# Altium PCB R1250GS HandHeater and rear 5-12V.PcbDoc
Units mm, origin at the board's own origin, x right, y up, seen from the top; angles counter-clockwise.
Board outline 78.2 x 49.2 mm, 2 copper layers (Top Layer, Bottom Layer); 55 components, 24 nets, 99 pads, 4 vias.
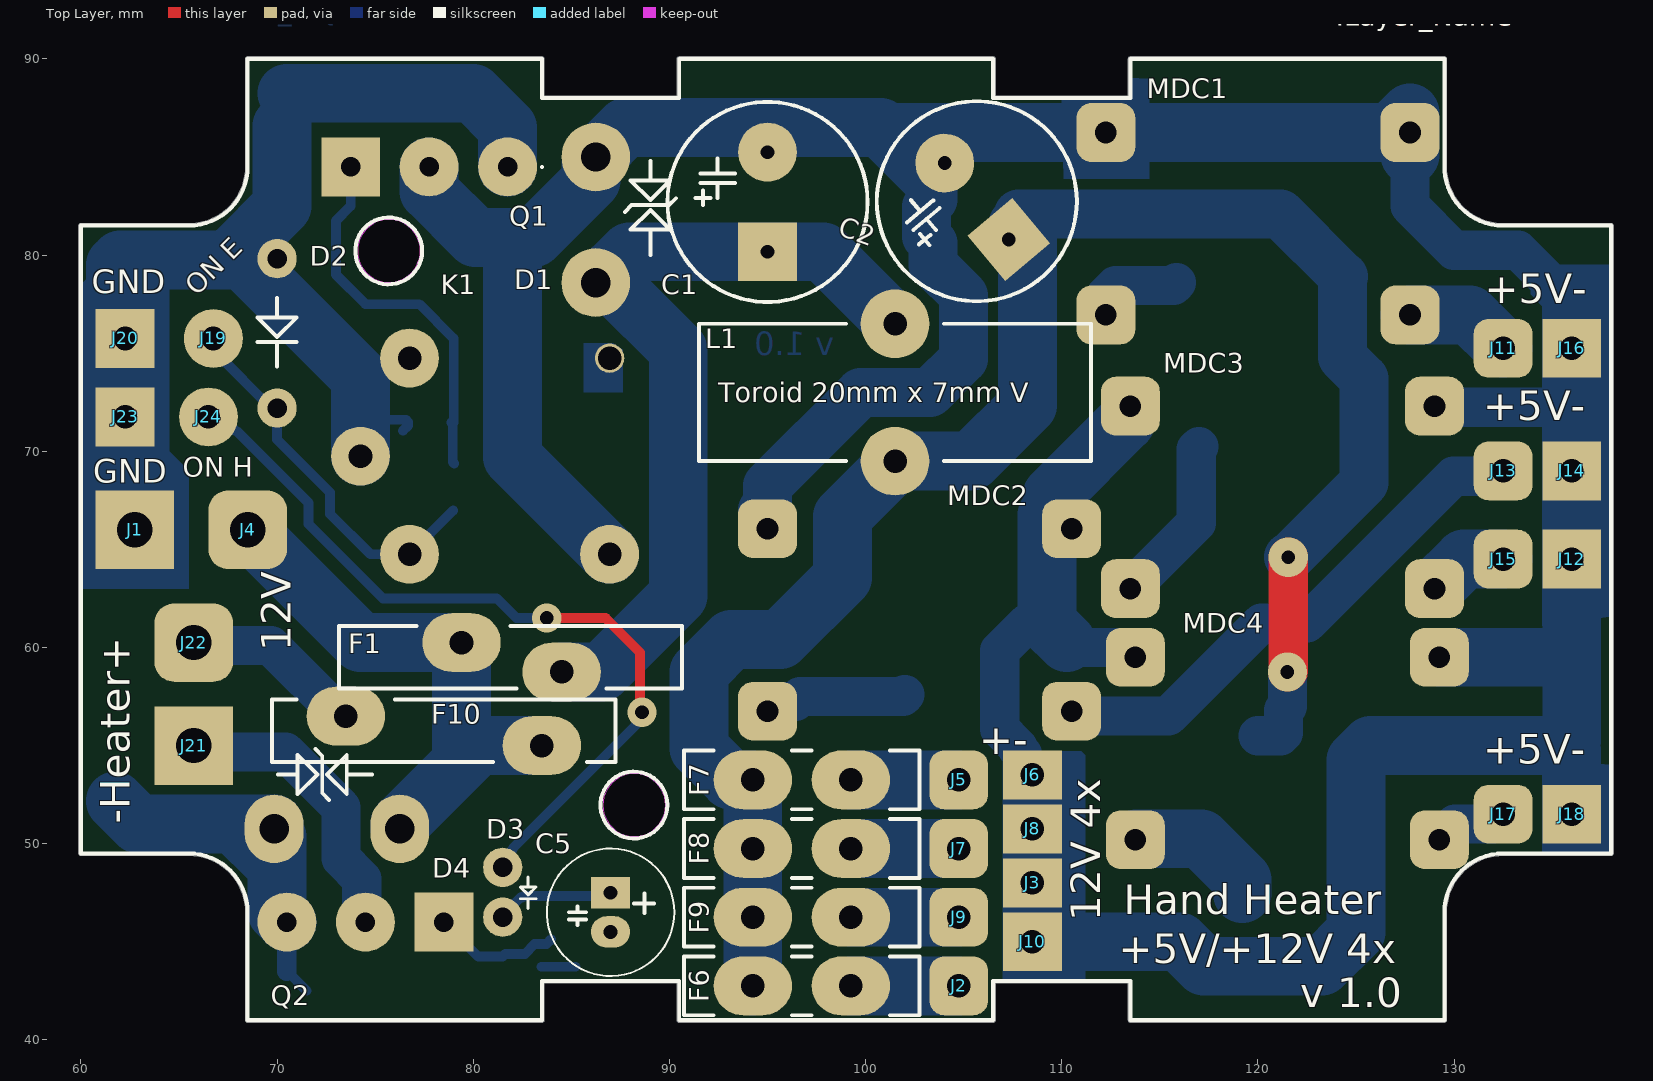
[diagram p0: Top Layer view]
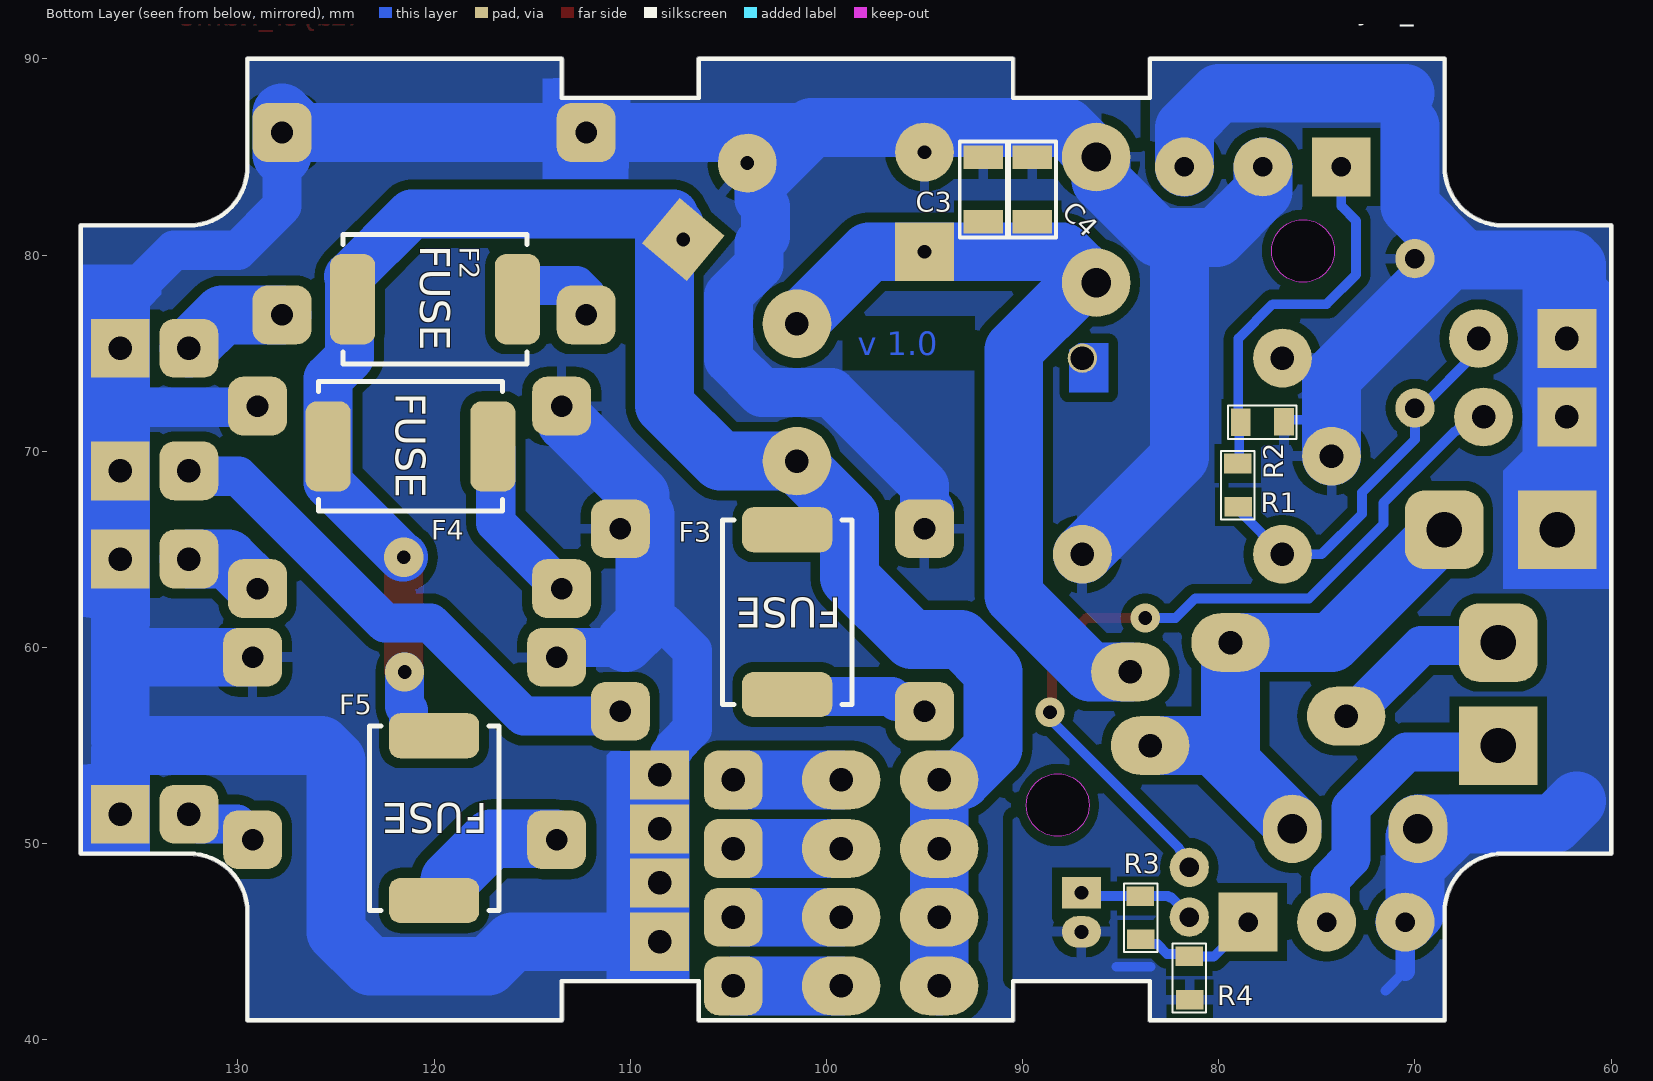
[diagram p1: Bottom Layer view, seen from below]

## Layer stack, top to bottom
Top Solder: solder mask 0.0102, Solder Resist, Dk 3.5
Top Layer: signal copper 0.0356
Dielectric 1: dielectric 0.32, FR-4, Dk 4.8
Bottom Layer: signal copper 0.0356
Bottom Solder: solder mask 0.0102, Solder Resist, Dk 3.5

## Board outline
68.4,41 68.4,46.5 cw(c68.5,46.5) 68.4,46.501 ccw(c65.5,46.5) 65.5,49.4 60,49.4 cw(c60,49.5) 59.9,49.5 59.9,81.5 cw(c60,81.5) 60,81.6 65.5,81.6 ccw(c65.5,84.5) 68.4,84.5 68.4,90 cw(c68.5,90) 68.5,90.1 83.5,90.1 cw(c83.5,90) 83.6,90 83.6,88.1 90.4,88.1 90.4,90 cw(c90.5,90) 90.5,90.1 106.5,90.1 cw(c106.5,90) 106.6,90 106.6,88.1 113.4,88.1 113.4,90 cw(c113.5,90) 113.5,90.1 129.5,90.1 cw(c129.5,90) 129.6,90 129.6,84.636 cw(c129.502,84.615) 129.603,84.615 cw(c129.502,84.615) 129.603,84.611 ccw(c132.5,84.5) 129.6,84.5 ccw(c132.5,84.5) 132.5,81.6 138,81.6 cw(c138,81.5) 138.1,81.5 138.1,49.501 138.1,49.5 cw(c138,49.5) 138,49.4 132.5,49.4 ccw(c132.5,49.5) 132.501,49.4 132.5,49.4 ccw(c132.5,46.5) 129.6,46.5 129.6,41 cw(c129.5,41) 129.5,40.9 113.5,40.9 cw(c113.5,41) 113.4,41 113.4,42.9 106.6,42.9 106.6,41 cw(c106.5,41) 106.5,40.9 90.5,40.9 cw(c90.5,41) 90.4,41 90.4,42.9 83.6,42.9 83.6,41 cw(c83.5,41) 83.5,40.9 68.5,40.9 cw(c68.5,41)
cut-out: 74.103,80.213 ccw(c75.703,80.213) 75.703,78.613 ccw(c75.703,80.213) 77.303,80.213 ccw(c75.703,80.213) 75.703,81.813 ccw(c75.703,80.213)
cut-out: 86.603,51.963 ccw(c88.203,51.963) 88.203,50.363 ccw(c88.203,51.963) 89.803,51.963 ccw(c88.203,51.963) 88.203,53.563 ccw(c88.203,51.963)

## Design rules (kind name [scope] priority, off if disabled: settings)
Clearance "Clearance_c5 pad" [InComponent('C5') vs InComponent('C5')] p1: gap=0.2 ignorepadtopadclearanceinfootprint=FALSE
Clearance [All] p2: gap=0.5 ignorepadtopadclearanceinfootprint=FALSE
ComponentClearance [All] p1: gap=0.01 collisioncheckmode=3 verticalgap=0.2 showdistances=FALSE
Height [All] p1: minheight=0 maxheight=30 prefheight=12.7
HoleSize [All] p1: absolutevalues=TRUE maxlimit=3.2 minlimit=0.4 maxpercent=80.000 minpercent=20.000
HoleToHoleClearance [All] p1: gap=0.2 allowstackedmicrovias=TRUE
PlaneClearance [All] p1: clearance=0.5
PlaneConnect [All] p1: planeconnectstyle=Relief reliefexpansion=0.508 reliefentries=4 reliefconductorwidth=0.5 reliefairgap=0.5
PolygonConnect [All] p1: connectstyle=Relief reliefconductorwidth=0.5 reliefentries=4 polygonreliefangle="90 Angle" airgapwidth=0.5
RoutingVias [All] p1: holewidth=0.7 width=1.5 viastyle="Through Hole" minholewidth=0.4 minwidth=0.4 maxholewidth=3.2 maxwidth=7
SilkToSilkClearance [All] p1: silktosilkclearance=0.05
SilkToSolderMaskClearance [IsPad] p1: minsilkscreentomaskgap=0.2 clearancetoexposedcopper=TRUE
SolderMaskExpansion [All] p1: expansion=0.1 istentingtop=FALSE
Width [All] p1: maxlimit=3 minlimit=0.2 preferedwidth=0.5
22 further rules are at their usual default settings.

## Components (designator, comment, footprint, x,y, rotation, side; value= is the part's Value field where it differs from the comment)
C1 "25V 1000uF" "Cap E p5.08mm D10.2mm (3p)" 95,80.17 r90 top
C2 "25V 1000uF" "Cap E p5.08mm D10.2mm (3p)" 107.3,80.8 r130 top
C3 "10nF" "SMD 1206 (3216)" 92,81.7 r90 bottom
C4 "100nF" "SMD 1206 (3216)" 89.5,81.7 r90 bottom
C5 "47uF 25V" "Cap E p2mm D6.5xH11" 87,47.5 r270 top
D1 "1.5KE20CA" "TVS diode DO-201 V"#1 86.25,85 r270 top
D2 "1N5819" "Diode DO-35" 70,79.82 r270 top value=1N5822
D3 "1N5822" "Diode DO-41 - Vertical" 81.5,48.79 r270 top
D4 "1.5KE20CA" "TVS diode DO-201 V"#2 69.85,50.75 r0 top
F1 "11A" "Fuse RGE1100" 79.4,59.5 r90 top
F2 "3A" "Fuse SM250" 115.75,77.75 r0 bottom
F3 "3A" "Fuse SM250" 102,57.6 r90 bottom
F4 "3A" "Fuse SM250" 117,70.25 r0 bottom
F5 "3A" "Fuse SM250" 120,47.1 r90 bottom
F6 "3A" "Fuse MF-R300 (3A)" 99.25,42.75 r270 top
F7 "3 A" "Fuse MF-R300 (3A)" 99.25,53.25 r270 top
F8 "3 A" "Fuse MF-R300 (3A)" 99.25,49.75 r270 top
F9 "3 A" "Fuse MF-R300 (3A)" 99.25,46.25 r270 top
F10 "5A" "Fuse MF-R500 (5A)" 83.5,55 r270 top
J1 "OnePinC" "OnePin 1.8x4 - Square" 62.75,66 r90 top
J2 "OnePinC" "OnePin 1.2x3 - Rounded" 104.75,42.75 r90 top
J3 "OnePinC" "OnePin 1.2x3 - Square"#1 108.5,48 r180 top
J4 "OnePinC" "OnePin 1.8x4 - Rounded" 68.5,66 r90 top
J5 "OnePinC" "OnePin 1.2x3 - Rounded" 104.75,53.25 r180 top
J6 "OnePinC" "OnePin 1.2x3 - Square"#1 108.5,53.5 r0 top
J7 "OnePinC" "OnePin 1.2x3 - Rounded" 104.75,49.75 r0 top
J8 "OnePinC" "OnePin 1.2x3 - Square"#1 108.5,50.75 r0 top
J9 "OnePinC" "OnePin 1.2x3 - Rounded" 104.75,46.25 r0 top
J10 "OnePinC" "OnePin 1.2x3 - Square"#2 108.5,45 r0 top
J11 "OnePinC" "OnePin 1.2x3 - Rounded" 132.5,75.25 r0 top
J12 "OnePinC" "OnePin 1.2x3 - Square"#2 136,64.5 r0 top
J13 "OnePinC" "OnePin 1.2x3 - Rounded" 132.5,69 r0 top
J14 "OnePinC" "OnePin 1.2x3 - Square"#2 136,69 r0 top
J15 "OnePinC" "OnePin 1.2x3 - Rounded" 132.5,64.5 r0 top
J16 "OnePinC" "OnePin 1.2x3 - Square"#2 136,75.25 r0 top
J17 "OnePinC" "OnePin 1.2x3 - Rounded" 132.5,51.5 r0 top
J18 "OnePinC" "OnePin 1.2x3 - Square"#2 136,51.5 r0 top
J19 "OnePinC" "OnePin 1.2x3" 66.75,75.75 r0 top
J20 "OnePinC" "OnePin 1.2x3 - Square"#2 62.25,75.75 r0 top
J21 "OnePinC" "OnePin 1.8x4 - Square" 65.75,55 r0 top
J22 "OnePinC" "OnePin 1.8x4 - Rounded" 65.75,60.25 r0 top
J23 "OnePinC" "OnePin 1.2x3 - Square"#2 62.25,71.75 r0 top
J24 "OnePinC" "OnePin 1.2x3" 66.5,71.75 r0 top
K1 "SRA-12VDC-CL" SRA-12VDC-CL 74.25,69.75 r0 top
L1 "Inductor V" "Toroid V D20 W7" 101.5,76.5 r270 top value=700nH
MDC1 "DC-DC" "DC-DC_MP1584N (SMALL)" 112.25,76.95 r0 top
MDC2 "DC-DC" "DC-DC_MP1584N (SMALL)" 95,56.75 r0 top
MDC3 "DC-DC" "DC-DC_MP1584N (SMALL)" 113.5,63 r0 top
MDC4 "DC-DC" "DC-DC_MP1584N (SMALL)" 113.75,50.2 r0 top
Q1 "IRF3205 PBf" "TO220-2 HighPower" 73.75,84.5 r270 top
Q2 "IRF3205 PBf" "TO220-2 HighPower" 78.5,46 r90 top
R1 "1k Om" "SMD 0805 (2012)" 79,67.25 r90 bottom
R2 "10k Om" "SMD 0805 (2012)" 76.75,71.5 r0 bottom
R3 "1 kOm" "SMD 0805 (2012)" 84,47.25 r270 bottom
R4 "20k Om" "SMD 0805 (2012)" 81.475,42.125 r90 bottom

## Footprints (in the part's own frame and the unit in brackets; to place one, negate y for a bottom-side part, rotate by r counter-clockwise, add the part's x,y. Pads: shape width x height; smd on the part's side, far side on the other; paste and mask are expansions set on the pad)
"Cap E p2mm D6.5xH11" [mm] "D 6.5mm; H 11mm"
  rect 1.6x2 hole 0.7: 1(0,0)
  oval 1.6x2 hole 0.7: 2(2,0)
  silkscreen extent -2.25,-3.25 4.25,3.25, body extent -2.22,-3.22 4.27,3.28, height 11.49
"Cap E p5.08mm D10.2mm (3p)" [mm] "D 10.2mm; H 17.5mm, Hole: 0.7mm"
  rect 3x3 hole 0.7: 1(0,0)
  round 3 hole 0.7: 2(5.08,0)
  silkscreen extent -2.56,-5.1 7.64,5.1, body extent -2.49,-4.97 7.57,5.08, height 16.53
"DC-DC_MP1584N (SMALL)" [mm]
  rrect50% 3x3 hole 1.1: GND(0,9.3) GND(15.5,9.3) IN(0,0) Out(15.5,0)
  body extent -1.27,-1.27 16.8,10.6, height 6.7
"Diode DO-35" [mm] "p7.62mm"
  round 2 hole 1: A(0,0) K(7.62,0)
  silkscreen extent 2,-1 5.5,1, body extent -0.32,-1 7.82,1.02, height 2.21
"Diode DO-41 - Vertical" [mm] "p10.16mm"
  round 2 hole 1: A(0,0) K(2.54,0)
  silkscreen extent 0.5,0.9 2.1,1.7, body extent -0.43,-1.37 3.9,1.37, height 9.64
"Fuse MF-R300 (3A)" [mm] "Resettable 11A"
  oval 3x4 hole 1.2: 1(0,0) 2(0,-5)
  silkscreen extent -1.5,-8.5 1.5,3.5, body extent -1.53,-6.19 1.43,1.39, height 15
"Fuse MF-R500 (5A)" [mm] "Resettable 11A"
  oval 3x4 hole 1.2: 1(0,0) 2(-1.5,-10)
  silkscreen extent -2.35,-13.75 0.85,3.75, body extent -2.21,-13.75 0.71,3.75, height 26.01
"Fuse RGE1100" [mm] "Resettable 11A"
  oval 3x4 hole 1.2: 1(0.75,0) 2(-0.75,-5.1)
  silkscreen extent -1.6,-11.25 1.6,6.25, body extent -1.46,-11.3 1.46,6.2, height 26.01
"Fuse SM250" [mm] "Resettable 11A"
  rrect50% 2.3x4.6 smd: 1(0,0) 2(8.4,0)
  silkscreen extent -0.5,-3.3 8.9,3.3, body extent -0.5,-3.35 8.9,3.36, height 3
"OnePin 1.2x3" [mm]
  round 3 hole 1.2: 1(0,0)
"OnePin 1.2x3 - Rounded" [mm]
  rrect50% 3x3 hole 1.2: 1(0,0)
"OnePin 1.2x3 - Square"#1 [mm]
  rect 3x2.5 hole 1.2: 1(0,0)
"OnePin 1.2x3 - Square"#2 [mm]
  rect 3x3 hole 1.2: 1(0,0)
"OnePin 1.8x4 - Rounded" [mm]
  rrect50% 4x4 hole 1.8: 1(0,0)
"OnePin 1.8x4 - Square" [mm]
  rect 4x4 hole 1.8: 1(0,0)
"SMD 0805 (2012)" [mm]
  rect 1x1.4 smd: 1(-0.075,0) 2(2.125,0.025)
  silkscreen extent -0.72,-0.82 2.78,0.87, body extent 0.03,-0.6 2.03,0.65, height 0.45
"SMD 1206 (3216)" [mm]
  rect 1.2x2 smd: 1(0,0) 2(3.3,0)
  silkscreen extent -0.8,-1.2 4.1,1.2, body extent 0.05,-0.75 3.25,0.85, height 1
SRA-12VDC-CL [mm]
  round 1.5 hole 1.2: 1(12.7,5)
  round 3 hole 1.2: 2(0,0) 3(12.7,-5) 4(2.5,-5) 5(2.5,5)
  body extent -3,-8 17,8, height 15
"TO220-2 HighPower" [mm]
  rect 3x3 hole 1: 1(0,0)
  round 3 hole 1: 2(0,4) 3(0,8)
  body extent -2.7,-1.2 1.8,9.2, height 19
"Toroid V D20 W7" [mm] "10mm Black ring TEC.ORG"
  round 3.5 hole 1.2: 1(0,0) 2(7,0)
  silkscreen extent 0,-10 7,10, body extent -0.77,-8.69 7.77,8.69, height 20.82
"TVS diode DO-201 V"#1 [mm] "6p, p15.24mm"
  round 3.5 hole 1.5: 1(0,0) 2(6.4,0)
  silkscreen extent 0.2,1.47 5,4.07, body extent -2.8,-2.8 7.09,2.8, height 15.69
"TVS diode DO-201 V"#2 [mm] "6p, p15.24mm"
  oval 3x3.5 hole 1.5: 1(0,0) 2(6.4,0)
  silkscreen extent 0.2,1.47 5,4.07, body extent -2.8,-2.8 7.09,2.8, height 15.69

## Part data
C1 C2: library part "Cap E 1000mF x 25V", "Capacitor"
C3 C4: library part "Cap Ceramic SMD (All)", "Capacitor"
C5: library part "Cap Elecrolitic", "Capacitor"
D1 D4: library part "TVS 1.5KE20CA", "1500W Transil (TVS Diode)", Pulse Power=1500W, Breakdown V="min 19 max 21", Load A=5, PackageReference=DO-201, Stand-Off V=17.1
D2 D3: library part "D Shotki All", "Shotki  Diode", PackageReference=DO-201
F1 F2 F3 F4 F5 F6 F7 F8 F9 F10: library part Fuse, "Round fuse"
J1 J2 J3 J4 J5 J6 J7 J8 J9 J10 J11 J12 J13 J14 J15 J16 J17 J18 J19 J20 J21 J22 J23 J24: library part "OnePin Connector", "Only pad"
K1: "Single-Pole Dual-Throw Relay", DataSheet=http://tec.org.ru/_bd/12/1208_SRA.pdf, I (AC = 240 V)=15-20A, I (DC = 30 V)=10A, Name=SRA-12VDC-CL, R обм="240 Om", U="12 V"
L1: "Inductor Vertical", Code_IEC=1005, Code_JEITA=0402, LatestRevisionDate=29-May-2009, LatestRevisionNote="IPC-7351 Footprint Added.", PackageDescription="Chip Inductor", PackageReference=0402-A, Published=8-Jun-2000, Publisher="Altium Limited"
MDC1 MDC2 MDC3 MDC4: library part "DC-DC MP1584N", "DC-DC StepDown"
Q1 Q2: library part IRF3205, "N-Channel 55V - 0.008Ω - 110A", I d - Drain current (continuous) at TC = 25°C="110 A", I d - Drain current (continuous) at TC = 100°C="80 A", C ISS Входная емкость="3247 pF", C OSS Выходная емкость="781 pF", DataSheet=http://tec.org.ru/_bd/2/223_IRF3205.pdf, Monufacturer=IOR, Name="IRF3205 PBf", RDS Сопротивление Сток-Исток="0.008 Om", URL=http://tec.org.ru/board/49-1-0-223, V DSS (v)=55V, VGS Макс напр на гейте="+-20 V", VGS Порог Открытия="+2....+4 V"
R1 R2 R3 R4: library part "Res All Types"

## Via types
v1: diameter 1.5, hole 0.7, Top Layer to Bottom Layer, 2 vias
v2: diameter 2, hole 0.7, Top Layer to Bottom Layer, 2 vias

## Nets (pads, with @x,y where several pads share a name; then routed paths per layer and width w, separated by ;. In a path a pad name is that pad's centre, name@x,y a point inside that pad or via, vN(x,y) a via of type N, cw(c..) or ccw(c..) an arc to the next point about the centre after c; other vN are vias at no path point)
"+5V #1": J11.1 MDC1.Out | length 5.5
  Bottom Layer w3: MDC1.Out 130.8,76.95 J11.1
"+5V #2": J13.1 MDC2.Out | length 27.3
  Bottom Layer w2: MDC2.Out 110.75,56.5 115.432,56.5 120.182,61.25 122.5,61.25 129.973,68.723 132.223,68.723 J13.1
"+5V #3": J15.1 MDC3.Out | length 4.1
  Bottom Layer w3: MDC3.Out 130.5,64.5 J15.1
"+5V #4": J17.1 MDC4.Out | length 3.8
  Bottom Layer w2: MDC4.Out 130.05,51 132,51 J17.1
"+12 V RAW": C1.1 C3.1 C4.1 D1.2 F1.2 L1.1 | length 43.1
  Bottom Layer w3: F1.2 86.55,58.75 90.45,62.65 90.45,75.17 87.116,78.504 86.346,78.504 D1.2 86.385,78.6 87.955,80.17 C1.1 97.83,80.17 L1.1
+12V: D4.2 F1.1 F10.1 J4.1 | length 28.5
  Bottom Layer w3: J4.1 69,65.5 74.25,60.25 78.9,60.25 F1.1 79.4,54.15 ; D4.2 76.25,51 79.4,54.15 ; F10.1 80.25,55 79.4,54.15
"+12V Heater": F10.2 J22.1 | length 9.3
  Bottom Layer w2: J22.1 65.9,60.1 69.671,60.1 73.271,56.5 F10.2
"+12V No Noise": C2.1 F2.2 F3.2 F4.2 F5.2 F6.2 F7.2 F8.2 F9.2 L1.2 | length 96.9
  Top Layer w2: v2(121.5,58.75) 121.55,58.8 v2(121.55,64.6)
  Bottom Layer w2: F5.2 121.15,55.5 121.3,55.65 121.3,56.8 121.5,57 v2(121.5,58.75)
  Bottom Layer w2.5: C2.1@107.75,81.5 C2.1@108.518,81.5 ; C2.1@107.8,82.1 121.15,82.1 F2.2@124.35,78.9 ; v2(121.55,64.6) 121.6,64.6 125.4,68.4 F4.2 125.4,73.7 124.3,74.8 F2.2@124.3,78.9
  Bottom Layer w3: F6.2 F9.2 F8.2 F7.2 93.111,53.25 91.5,54.861 91.5,58.75 93.15,60.4 95.65,60.4 98.818,63.568 98.818,66.682 101.5,69.365 L1.2 105.4,69.5 108.25,72.35 108.25,81 C2.1@107.75,81.5
GND: C1.2 C2.2 C3.2 C4.2 D1.1 J3.1 J6.1 J8.1 J10.1 J12.1 J14.1 J16.1 J18.1 K1.3 MDC1.GND MDC2.GND MDC3.GND MDC4.GND Q1.2 | length 225.5
  Bottom Layer w2: J6.1 108.25,53.5 108,53.75 108,54.568 107.75,54.818 107.75,54.932 106.841,55.841 106.841,59.841 108.25,61.25 109.25,61.25 ; 110.25,60.25 110.5,60 113.25,60 MDC4.GND@113.75,59.5 ; MDC1.GND@127.75,85.106 127.75,82.5 130,80.25 133.25,80.25 135.8,77.7 J16.1@135.8,76.329 ; MDC3.GND@129,72.25 136.254,72.25
  Bottom Layer w2.5: MDC2.GND@94.75,67 95,67.25 95,68.25 99.75,73 103.286,73 105,74.714 105,77.95 103.446,79.503 103.446,80.614 103.1,80.96 103.1,82.488 103.446,82.834 103.446,83.944 C2.2@103.351,84.04
  Bottom Layer w3: Q1.2 77.75,83.257 80.113,80.894 83.094,80.894 86,83.8 86,84.615 86.154,84.769 86.154,84.904 D1.1 87.75,86.5 92.5,86.5 95,86.5 100.75,86.5 101,86.25 ; 82,80.75 82,69.7 K1.3 ; C2.2@103.351,84.04 103.21,84.04 101,86.25 ; J6.1@108.5,53 J8.1 J3.1 J10.1 116,45 117.25,43.75 123.25,43.75 125,45.5 125,54.25 125.75,55 135.75,55 ; 110.25,60.25 109.25,61.25 109.25,66.75 109.5,67 109.5,67.75 MDC3.GND@113.25,71.5 ; MDC1.GND@127.75,85.106 127.75,87.25 126.75,86.25 112.25,86.25 101,86.25 ; MDC4.GND@129.25,59.5 134.353,59.5 ; J18.1 136,54.75 135.75,55 ; J12.1@136,65.25 J12.1 136,55.25 135.75,55 ; J16.1 136.254,74.996 136.254,72.25 136.254,66.417
"GND Heater": J21.1 Q2.2 | length 15.5
  Bottom Layer w2: J21.1@65.75,55.75 65.75,55.672 66.75,54.672 70.421,54.672 73.25,51.843 73.25,49.257 74.309,48.199 74.309,46.191 Q2.2
"GND In": C5.2 D2.A D4.1 J1.1 J20.1 J23.1 K1.2 K1.5 Q1.3 Q2.3 R2.1 R4.1 | length 82.2
  Bottom Layer w0.5: 70.5,43.5 71.5,42.5 ; K1.2 K1.2@74.925,69.75 ; 74.25,71.607 76.568,71.607 R2.1 76.675,71.3 R2.1@76.425,71.05 ; 74.25,73.75 74.772,74.272 76.272,74.272 K1.5 ; 83.472,43.722 85.222,43.722
  Bottom Layer w1: 70.5,43.5 Q2.3
  Bottom Layer w3: 61.75,52.172 62.922,51 D4.1@69.85,51 ; 61.75,79.5 61.75,65 J1.1 ; 62,79.75 67.5,79.75 67.875,80.125 ; D4.1 69.85,50.5 70,50.35 70,46.5 Q2.3 ; 70.25,86.578 70.25,82.5 67.875,80.125 ; 70.5,88.25 79.993,88.25 81.75,86.493 Q1.3 ; K1.2 74.25,71.607 74.25,73.75 68.44,79.56 67.875,80.125
"Heater IN": D3.A J24.1 | length 41.5
  Top Layer w0.5: v1(83.75,61.5) 86.75,61.5 88.5,59.75 88.5,56.8 v1(88.6,56.7)
  Bottom Layer w0.5: J24.1 67.176,71.75 67.905,71.021 67.953,71.021 71.6,67.375 71.6,66.3 75.4,62.5 81.2,62.5 82.2,61.5 v1(83.75,61.5) ; D3.A 81.5,49.196 82.007,49.703 82.007,49.757 88.6,56.35 v1(88.6,56.7)
NetC5_1: C5.1 D3.K R3.1 | length 5.8
  Bottom Layer w0.5: D3.K@81.5,46.75 81.906,46.75 82.406,47.25 82.5,47.25 82.575,47.325 R3.1 86.825,47.325 C5.1
NetF2_1: F2.1 MDC1.IN | length 3.9
  Bottom Layer w2: MDC1.IN@112.25,77.95 112.75,78.45 115.7,78.45 F2.1@115.85,78.6
NetF3_1: F3.1 MDC2.IN | length 7.4
  Bottom Layer w2: MDC2.IN 95.5,57.25 96.422,57.25 96.672,57.5 101.9,57.5 F3.1
NetF4_1: F4.1 MDC3.IN | length 8.7
  Bottom Layer w2: MDC3.IN 116.85,66.35 116.85,70.1 F4.1
NetF5_1: F5.1 MDC4.IN | length 7
  Bottom Layer w3: MDC4.IN 113.8,50.25 117.093,50.25 119.2,48.143 F5.1@119.2,47.45
NetF6_1: F6.1 J2.1 | length 5.5
  Bottom Layer w3: F6.1 J2.1
NetF7_1: F7.1 J5.1 | length 5.5
  Bottom Layer w3: F7.1 J5.1
NetF8_1: F8.1 J7.1 | length 5.5
  Bottom Layer w3: F8.1 J7.1
NetF9_1: F9.1 J9.1 | length 5.5
  Bottom Layer w3: F9.1 J9.1
NetQ1_1: Q1.1 R1.2 R2.2 | length 19.6
  Bottom Layer w0.5: Q1.1 73.75,82.5 73,81.75 73,79 74.5,77.5 77.25,77.5 79,75.75 R2.2@79,71.475 ; R2.2 78.95,71.4 78.95,71 78.95,69.45 R1.2
NetQ2_1: Q2.1 R3.2 R4.2 | length 6.6
  Bottom Layer w0.5: Q2.1 80.25,44.25 R4.2 81.63,44.38 82.63,44.38 83.125,44.875 83.725,44.875 R3.2
"ON Ingition": D2.K J19.1 K1.4 R1.1 | length 19.5
  Bottom Layer w0.5: J19.1 66.75,75.15 D2.K@69.85,72.05 ; D2.K 70,70.6 72.7,67.9 72.7,66.8 74.75,64.75 K1.4 R1.1@78.975,66.975
pads on no net: K1.1

## Polygon pours and split planes (outlines as drawn)
GND on Bottom Layer "GND_L02_P001" (solid, pour order 1): 89,43.5 75.2,60.3 75.2,90 83.5,90.1 cw(c83.5,90) 83.6,90 83.6,88.1 90.4,88.1 90.4,90 cw(c90.5,90) 90.5,90.1 106.5,90.1 cw(c106.5,90) 106.6,90 106.6,88.1 113.4,88.1 113.4,90 cw(c113.5,90) 113.5,90.1 129.5,90.1 cw(c129.5,90) 129.6,90 129.6,84.636 cw(c129.519,84.617) 129.603,84.615 ccw(c132.585,84.5) 129.6,84.5 ccw(c132.5,84.5) 132.5,81.6 138,81.6 cw(c138,81.5) 138.1,81.5 138.1,49.501 cw(c138,49.5) 138,49.4 132.5,49.4 ccw(c132.5,46.5) 129.6,46.5 129.6,41 cw(c129.5,41) 129.5,40.9 113.5,40.9 cw(c113.5,41) 113.4,41 113.4,42.9 106.6,42.9 106.6,41 cw(c106.5,41) 106.5,40.9 90.5,40.9 cw(c90.5,41) 90.4,41 90.4,42.9
"GND In" on Bottom Layer "GND_IN_L02_P000" (solid, pour order 0): 68.5,41 68.5,46.5 ccw(c65.5,46.5) 65.5,49.5 60,49.5 60,81.5 65.5,81.5 ccw(c65.5,84.5) 68.5,84.5 68.5,90 83.5,90 83.5,84.5 75.5,84.5 75.5,79.5 79.5,75.5 79.5,67 77,64.5 78.9,62.5 82.75,62.5 90.5,55.5 90.5,43 83.5,43 83.5,41

## Other copper
Top Layer:
  text ".Layer_Name" at 123.975,91.7 h1
Bottom Layer:
  region net GND: 107,42.9 111.2,42.9 111.2,54.5 111,54.7 107,54.7
  region net GND: 138.1,54 138.071,53.971 138.071,49.429 134.529,49.429 134.5,49.4 134.5,54.4
  region net GND: 138.1,61.6 138.1,79.6 138,79.5 133.9,79.5 133.9,78 134.5,77.4 134.5,61.1
  region net GND: 114.45,89 114.45,83.9 110.1,83.9 110,88.1 113.4,88.1 113.4,89.05
  region net "GND In": 66.9,49.8 68.6,48.1 70.5,48.1 70.5,51.4 70.6,51.5 70.5,51.6 66.6,51.6
  region net "GND In": 65.5,63 65.5,69 64.5,70 64.5,79 60.5,79 60,78.5 60,63
  region: 85.625,75.5 87.125,75.5 87.625,75.167 87.625,73 85.625,73
  text ".Layer_Name" at 75,92 h1
  text "v 1.0" at 98.4,74.9 h1.2

## Silkscreen, mask and mechanical layers (free items; w line width, h text height)
Top Overlay:
  circle w0.2: c75.69,80.216 r1.706
  circle w0.2: c88.19,51.966 r1.706
  lines w0.2: 129.5,84.5 129.5,90 113.5,90 113.5,88 106.5,88 106.5,90 90.5,90 90.5,88 83.5,88 83.5,90 68.5,90 68.5,84.5 cw(c65.5,84.5) 65.5,81.5 60,81.5 60,49.5 65.5,49.5 cw(c65.5,46.5) 68.5,46.5 68.5,41 83.5,41 83.5,43 90.5,43 90.5,41 106.5,41 106.5,43 113.5,43 113.5,41 129.5,41 129.5,46.5 cw(c132.5,46.5) 132.5,49.5 138,49.5 138,81.5 132.5,81.5 cw(c132.5,84.5) 129.502,84.615 ; 83.5,84.5 83.5,84.5
  text ".Layer_Name" at 123.975,91.7 h1
  text "GND" at 60.55,78.05 h1.2
  text "ON E" at 65.9,77.883 h1 r45
  text "+5V-" at 131.55,77.55 h1.5
  text "+5V-" at 131.496,71.581 h1.5
  text "ON H" at 65.2,68.7 h1
  text "GND" at 60.625,68.389 h1.2
  text "12V" at 70.7,59.8 h1.5 r90
  text "+-" at 105.8,54.55 h1.5
  text "+5V-" at 131.496,54.081 h1.5
  text "-Heater+" at 62.5,51 h1.5 r90
  text "Hand Heater" at 113.15,46.4 h1.5
  text "12V 4x" at 111.95,46.05 h1.5 r90
  text "+5V/+12V 4x" at 112.9,43.9 h1.5
  text "v 1.0" at 122.15,41.65 h1.5
Bottom Overlay:
  lines w0.2: 129.5,84.5 129.5,90 113.5,90 113.5,88 106.5,88 106.5,90 90.5,90 90.5,88 83.5,88 83.5,90 68.5,90 68.5,84.5 cw(c65.5,84.5) 65.5,81.5 60,81.5 60,49.5 65.5,49.5 cw(c65.5,46.5) 68.5,46.5 68.5,41 83.5,41 83.5,43 90.5,43 90.5,41 106.5,41 106.5,43 113.5,43 113.5,41 129.5,41 129.5,46.5 cw(c132.5,46.5) 132.5,49.5 138,49.5 138,81.5 132.5,81.5 cw(c132.5,84.5) 129.502,84.615
  text ".Layer_Name" at 75,92 h1
Top Solder:
  text ".Layer_Name" at 123.975,91.7 h1
Bottom Solder:
  region: 92.9,76.4 92.9,74.6 98.8,74.6 98.8,76.4
  lines w1: 108.7,53 125.6,53
  lines w1.5: 108.5,53.5 108.5,54.2 107.4,55.3 107.4,59.3 107.4,59.4 109.6,61.6 ; 129.25,59.5 135.3,59.5
  lines w2: 65.75,60.25 65.85,60.15 ; 66,54.7 70.4,54.7 73.3,51.8 73.3,49.2 74.3,48.2 74.3,46.2 74.5,46 ; 66.9,60.1 69.7,60.1 73.3,56.5 73.5,56.5 ; 73.3,56.4 73.3,56.7 ; 95,66.05 95,67.9 100.2,73.1 103,73.1 105,75.1 105,77.9 96.8,86.1 96.4,86.1 ; 95.2,56.2 96.6,57.6 102,57.6 ; 99.25,42.75 104.75,42.75 ; 99.25,46.25 104.75,46.25 ; 99.25,49.75 104.75,49.75 ; 99.25,53.25 104.75,53.25 ; 110.4,56.5 115.4,56.5 120.1,61.2 122.5,61.2 130,68.7 132.2,68.7 132.5,69 ; 112.25,76.95 112.25,77.65 113.1,78.5 115.4,78.5 ; 112.3,60 111.2,60 109.6,61.6 109.6,68.6 113.3,72.3 113.5,72.3 ; 113.5,63 113.6,63 116.9,66.3 116.9,69.2 ; 113.75,50.2 117.2,50.2 120,47.4 120,47.1 ; 120.2,55.6 121.5,56.9 121.5,58.75 ; 127.75,76.95 130.75,76.95 132.45,75.25 132.5,75.25 ; 129,63 129.1,63 130.6,64.5 132.5,64.5 ; 129,72.3 135.9,72.3
  lines w2.5: 67.3,79.4 65,79.4 62.25,76.65 62.25,75.75 62.25,63.85 61.7,63.3 61.7,51.9 62.675,50.925 68.275,50.925 70,49.2 70,46.5 ; 68.5,66 74.2,60.3 79.7,60.3 79.4,60 79.4,54.1 76.6,51.3 ; 74.25,69.75 74.25,73.05 67.6,79.7 70.2,82.3 70.2,87.1 71.2,88.1 80.2,88.1 81.75,86.55 81.75,84.5 ; 77.75,84.5 77.75,83.35 82.4,78.7 82.4,69.3 86.95,64.75 ; 79.8,55 83.5,55 ; 80.075,81.025 83.125,81.025 ; 82.4,78.1 82.4,80.3 83.125,81.025 ; 84.5,58.75 86.55,58.75 90.5,62.7 90.5,75.1 86.7,78.9 87.1,78.9 88.3,80.1 97.9,80.1 101.5,76.5 ; 94.25,42.75 94.25,52.15 91.5,54.9 91.5,58.8 93.1,60.4 95.6,60.4 98.8,63.6 98.8,66.7 101,68.9 ; 101.5,69.5 105.4,69.5 108.2,72.3 108.2,81.7 108.7,82.2 121.1,82.2 124,79.3 ; 108.5,53.5 108.5,45 114.5,45 115.6,43.9 123.1,43.9 125.1,45.9 125.1,52 128.7,55.6 131.1,55.6 136,60.5 ; 121.55,64.6 121.7,64.6 125.3,68.2 ; 124.2,76.4 124.2,74.8 125.5,73.5 125.5,70.3 ; 136,51.5 136,77.7 133.9,79.8 127.313,80.788 121.901,86.2 100.6,86.2 100.3,86.5 88,86.5 86.5,85 86.25,85 86.25,84.15 83.125,81.025
  text ".Layer_Name" at 75,92 h1
Mechanical 2:
  text "78 x 49 mm h22(26.5)mm" at 61,95.25 h1
  text "T O P" at 110,94 h2.7
  text "G1020BF Gainta Case" at 60.975,93.475 h1
  text ".Pcb_File_Name_No_Path" at 60.925,91.425 h1
Mechanical 3:
  text "78 x 49 mm h22(26.5)mm" at 139,95.25 h1
  text "T O P" at 90,94 h2.7
  text "G1020BF Gainta Case" at 138.975,93.475 h1
  text ".Pcb_File_Name_No_Path" at 138.925,91.425 h1

## Dimensions
60,41 to 138,40.5 on Mechanical 3
60,90 to 60,41 on Mechanical 3
60,90 to 60,41 on Mechanical 2
60,41 to 138,40.5 on Mechanical 2

## Text inside footprints (layer, text, board x,y; h text height)
F2: Bottom Overlay "FUSE" at 120.696,80.496 h1.52 r90
F3: Bottom Overlay "FUSE" at 99.254,62.546 h1.52 r180
F4: Bottom Overlay "FUSE" at 121.946,72.996 h1.52 r90
F5: Bottom Overlay "FUSE" at 117.254,52.046 h1.52 r180
L1: Top Overlay "Toroid 20mm x 7mm V" at 92.5,72.5 h1